# EAGLE board INA3221 (EAGLE 7.6.0)
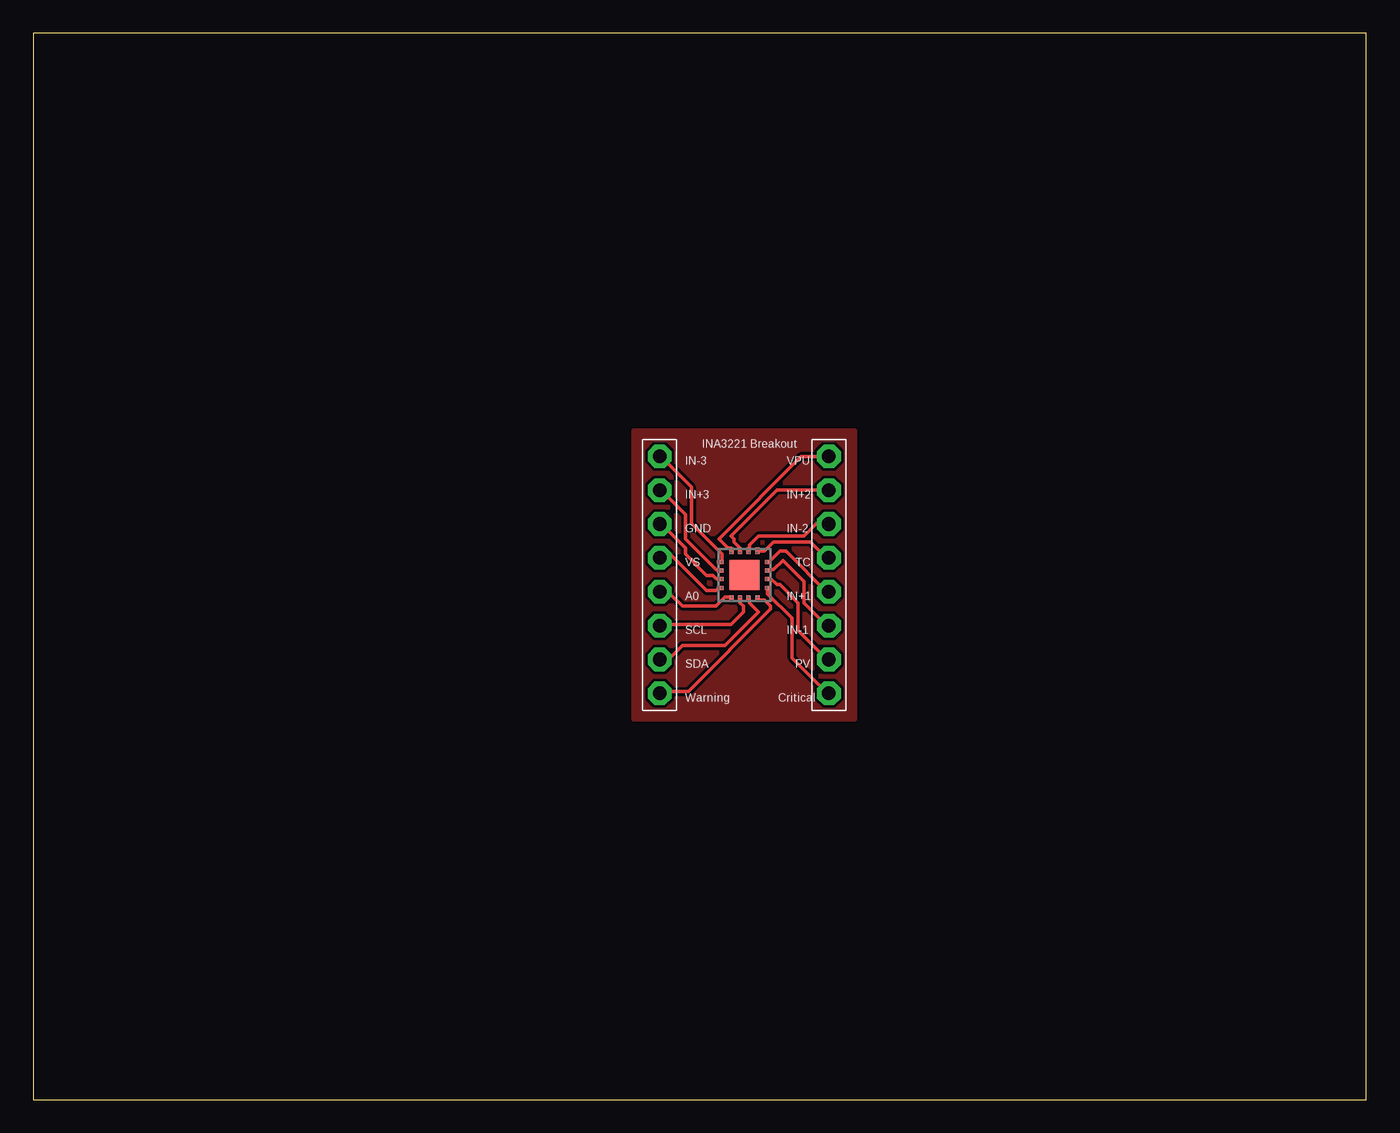
[diagram p0: board, top side]
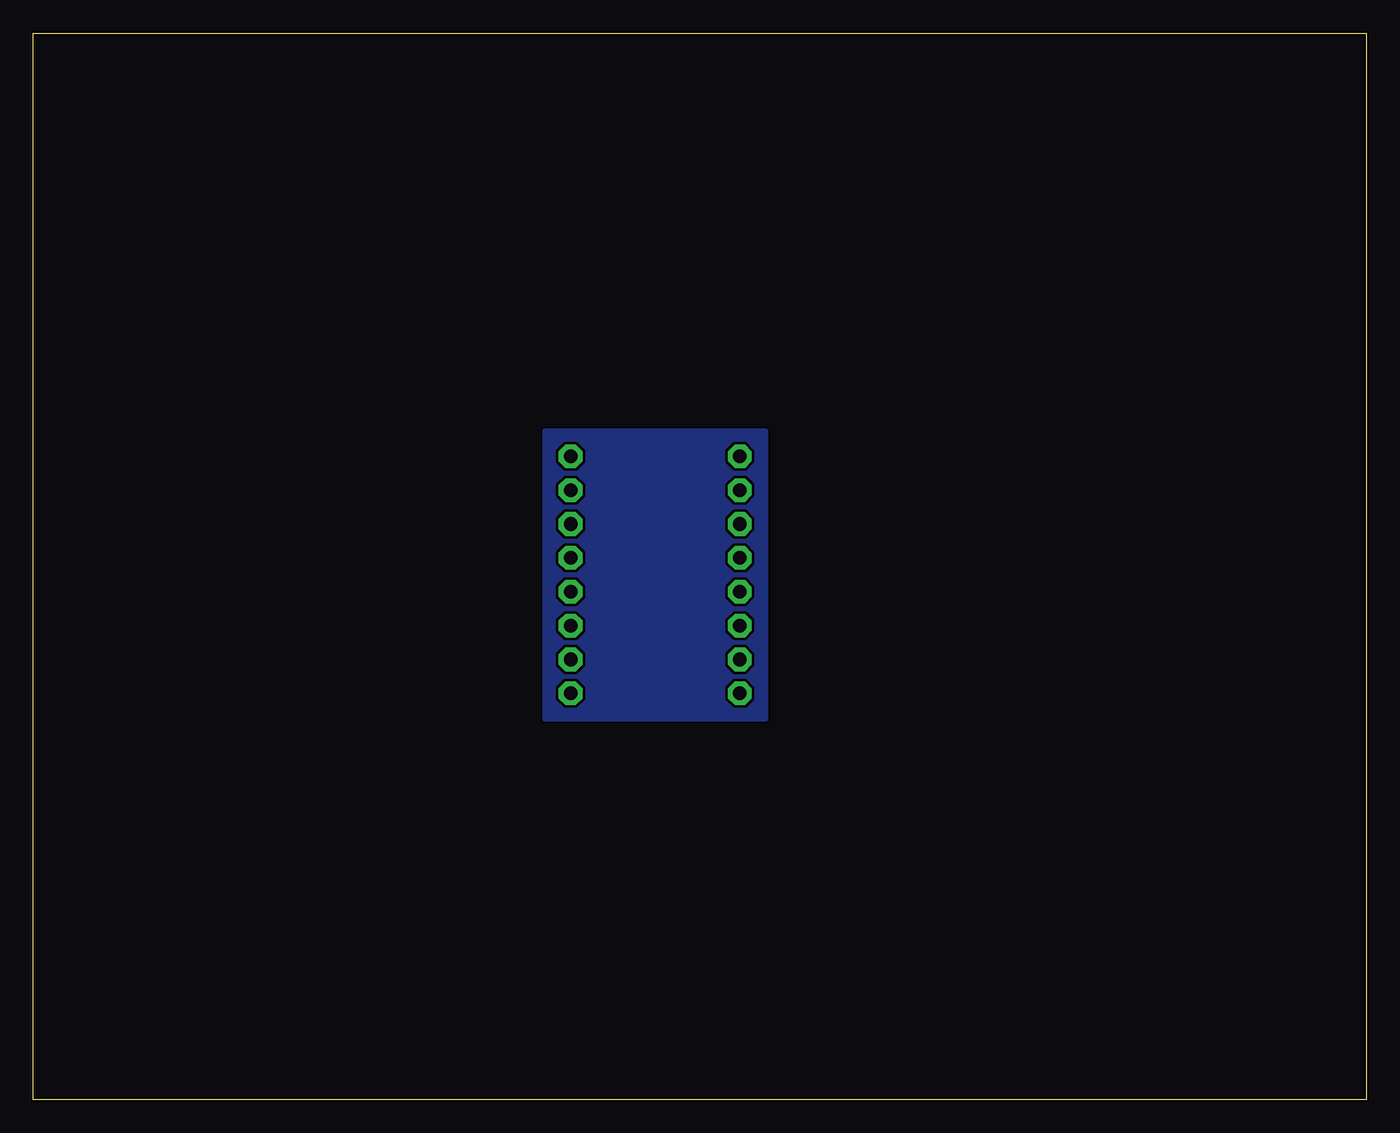
[diagram p1: board, bottom side, seen from below]

Size 100 x 80 mm. Coordinates in mm from the lower left corner, seen from the top.
Outline: 0,0 100,0 100,80 0,80 0,0
Copper layers (1*16): Top 0.035mm / dielectric 1.5mm / Bottom 0.035mm
Design rules "default": minimum track width 10mil, minimum drill 24mil, track to track 8mil, track to pad 8mil, pad to pad 8mil, via to via 8mil, smd to smd 8mil, copper to edge 40mil, drill to drill 8mil, minimum pad ring 10mil, minimum via ring 8mil, stop-mask expansion 4mil, vias tented up to drill 0mil, thermal gap 10mil

## Footprints (pad centres in the part's own frame; a part is rotated, then mirrored left to right if it is on the bottom)
1X08-BIG = drill 1.016 pad 1.778 octagon: 1 -8.89,0; 2 -6.35,0; 3 -3.81,0; 4 -1.27,0; 5 1.27,0; 6 3.81,0; 7 6.35,0; 8 8.89,0
HVQFN16_4X4 = smd 0.5 x 0.3: 1 -1.8,0.975; 2 -1.8,0.325; 3 -1.8,-0.325; 4 -1.8,-0.975; 9 1.8,-0.975; 10 1.8,-0.325; 11 1.8,0.325; 12 1.8,0.975 | smd 0.3 x 0.5: 5 -0.975,-1.8; 6 -0.325,-1.8; 7 0.325,-1.8; 8 0.975,-1.8; 13 0.975,1.8; 14 0.325,1.8; 15 -0.325,1.8; 16 -0.975,1.8 | smd 2.25 x 2.25: TH 0,0

## Placement (x,y rotation side)
JP1  [1X08-BIG]  59.69,39.37 270 top
JP2  [1X08-BIG]  46.99,39.37 90 top
U1  INA3221.  [HVQFN16_4X4]  53.34,39.37 0 top

## Library data of the parts
JP1 JP2 = adafruit
U1 = INA3221

## Nets
N$1: JP2.8 U1.1
N$2: JP2.7 U1.2
N$3: JP2.6 U1.3
N$4: JP2.5 U1.4
N$5: JP2.4 U1.5
N$6: JP2.3 U1.6
N$7: JP2.2 U1.7
N$8: JP2.1 U1.8
N$9: JP1.8 U1.9
N$10: JP1.7 U1.10
N$11: JP1.6 U1.11
N$12: JP1.5 U1.12
N$13: JP1.4 U1.13
N$14: JP1.3 U1.14
N$15: JP1.2 U1.15
N$16: JP1.1 U1.16

## Tracks (layer width: path | path; a pad name or v marks a point on that pad's centre or on a via)
N$1
  Top 0.254: U1.1 51.66,40.46 51.66,40.92 49.38,43.2 49.38,45.95 47.09,48.23 JP2.8
N$2
  Top 0.254: U1.2 51.44,39.78 51.21,39.78 48.92,42.06 48.92,43.89 47.09,45.72 JP2.7
N$3
  Top 0.254: U1.3 51.44,39.09 51.21,39.09 50.98,39.32 50.52,39.32 48.92,40.92 48.92,41.38 47.09,43.2 JP2.6
N$4
  Top 0.254: U1.4 51.44,38.41 51.21,38.18 50.52,38.18 47.78,40.92 47.32,40.92 47.09,40.69 JP2.5
N$5
  Top 0.254: U1.5 52.35,37.72 51.89,37.72 51.21,37.03 48.69,37.03 47.78,37.95 47.09,37.95 JP2.4
N$6
  Top 0.254: U1.6 53.03,37.49 53.03,37.26 53.26,37.03 53.26,36.58 52.35,35.66 47.09,35.66 JP2.3
N$7
  Top 0.254: U1.7 53.72,37.49 53.72,37.26 54.41,36.58 51.89,34.06 48.69,34.06 47.78,33.15 47.09,33.15 JP2.2
N$8
  Top 0.254: U1.8 54.41,37.49 54.86,37.49 55.32,37.03 55.32,36.8 49.15,30.63 47.09,30.63 JP2.1
N$9
  Top 0.254: U1.9 55.09,38.41 55.09,37.95 56.92,36.12 56.92,33.15 59.66,30.4 JP1.8
N$10
  Top 0.254: U1.10 55.32,39.09 55.78,38.63 56.01,38.63 57.38,37.26 57.38,35.2 59.66,32.92 JP1.7
N$11
  Top 0.254: U1.11 55.32,39.78 55.55,39.78 56.24,40.46 57.84,38.86 57.84,37.26 59.66,35.43 JP1.6
N$12
  Top 0.254: U1.12 55.32,40.46 56.01,41.15 56.46,41.15 59.66,37.95 JP1.5
N$13
  Top 0.254: U1.13 54.41,41.15 54.86,41.15 55.55,41.83 58.29,41.83 59.66,40.46 JP1.4
N$14
  Top 0.254: U1.14 53.72,41.38 53.72,41.6 54.41,42.29 57.84,42.29 58.75,43.2 59.66,43.2 JP1.3
N$15
  Top 0.254: JP1.2 55.78,45.72 52.35,42.29 52.58,42.06 52.58,41.83 53.03,41.38 U1.15
N$16
  Top 0.254: U1.16 52.35,41.38 52.12,41.38 51.44,42.06 57.61,48.23 59.66,48.23 JP1.1
N$17
  pour Top: 45.09,50.16 61.59,50.16 61.59,28.57 45.09,28.57
N$18
  pour Bottom: 45.09,50.16 61.59,50.16 61.59,28.57 45.09,28.57

## Text on the board
tPlace: INA3221 Breakout
tNames: IN-3 | VPU | IN+3 | IN+2 | GND | IN-2 | VS | TC | A0 | IN+1 | SCL | IN-1 | SDA | PV | Warning | Critical